# Altium PCB Universal_Driver v2.PcbDoc (part 1 of 2)
Units mm, origin at the board's own origin, x right, y up, seen from the top; angles counter-clockwise.
Board outline 105.6 x 112.5 mm, 2 copper layers (Top Layer, Bottom Layer); 170 components, 193 nets, 695 pads, 184 vias.
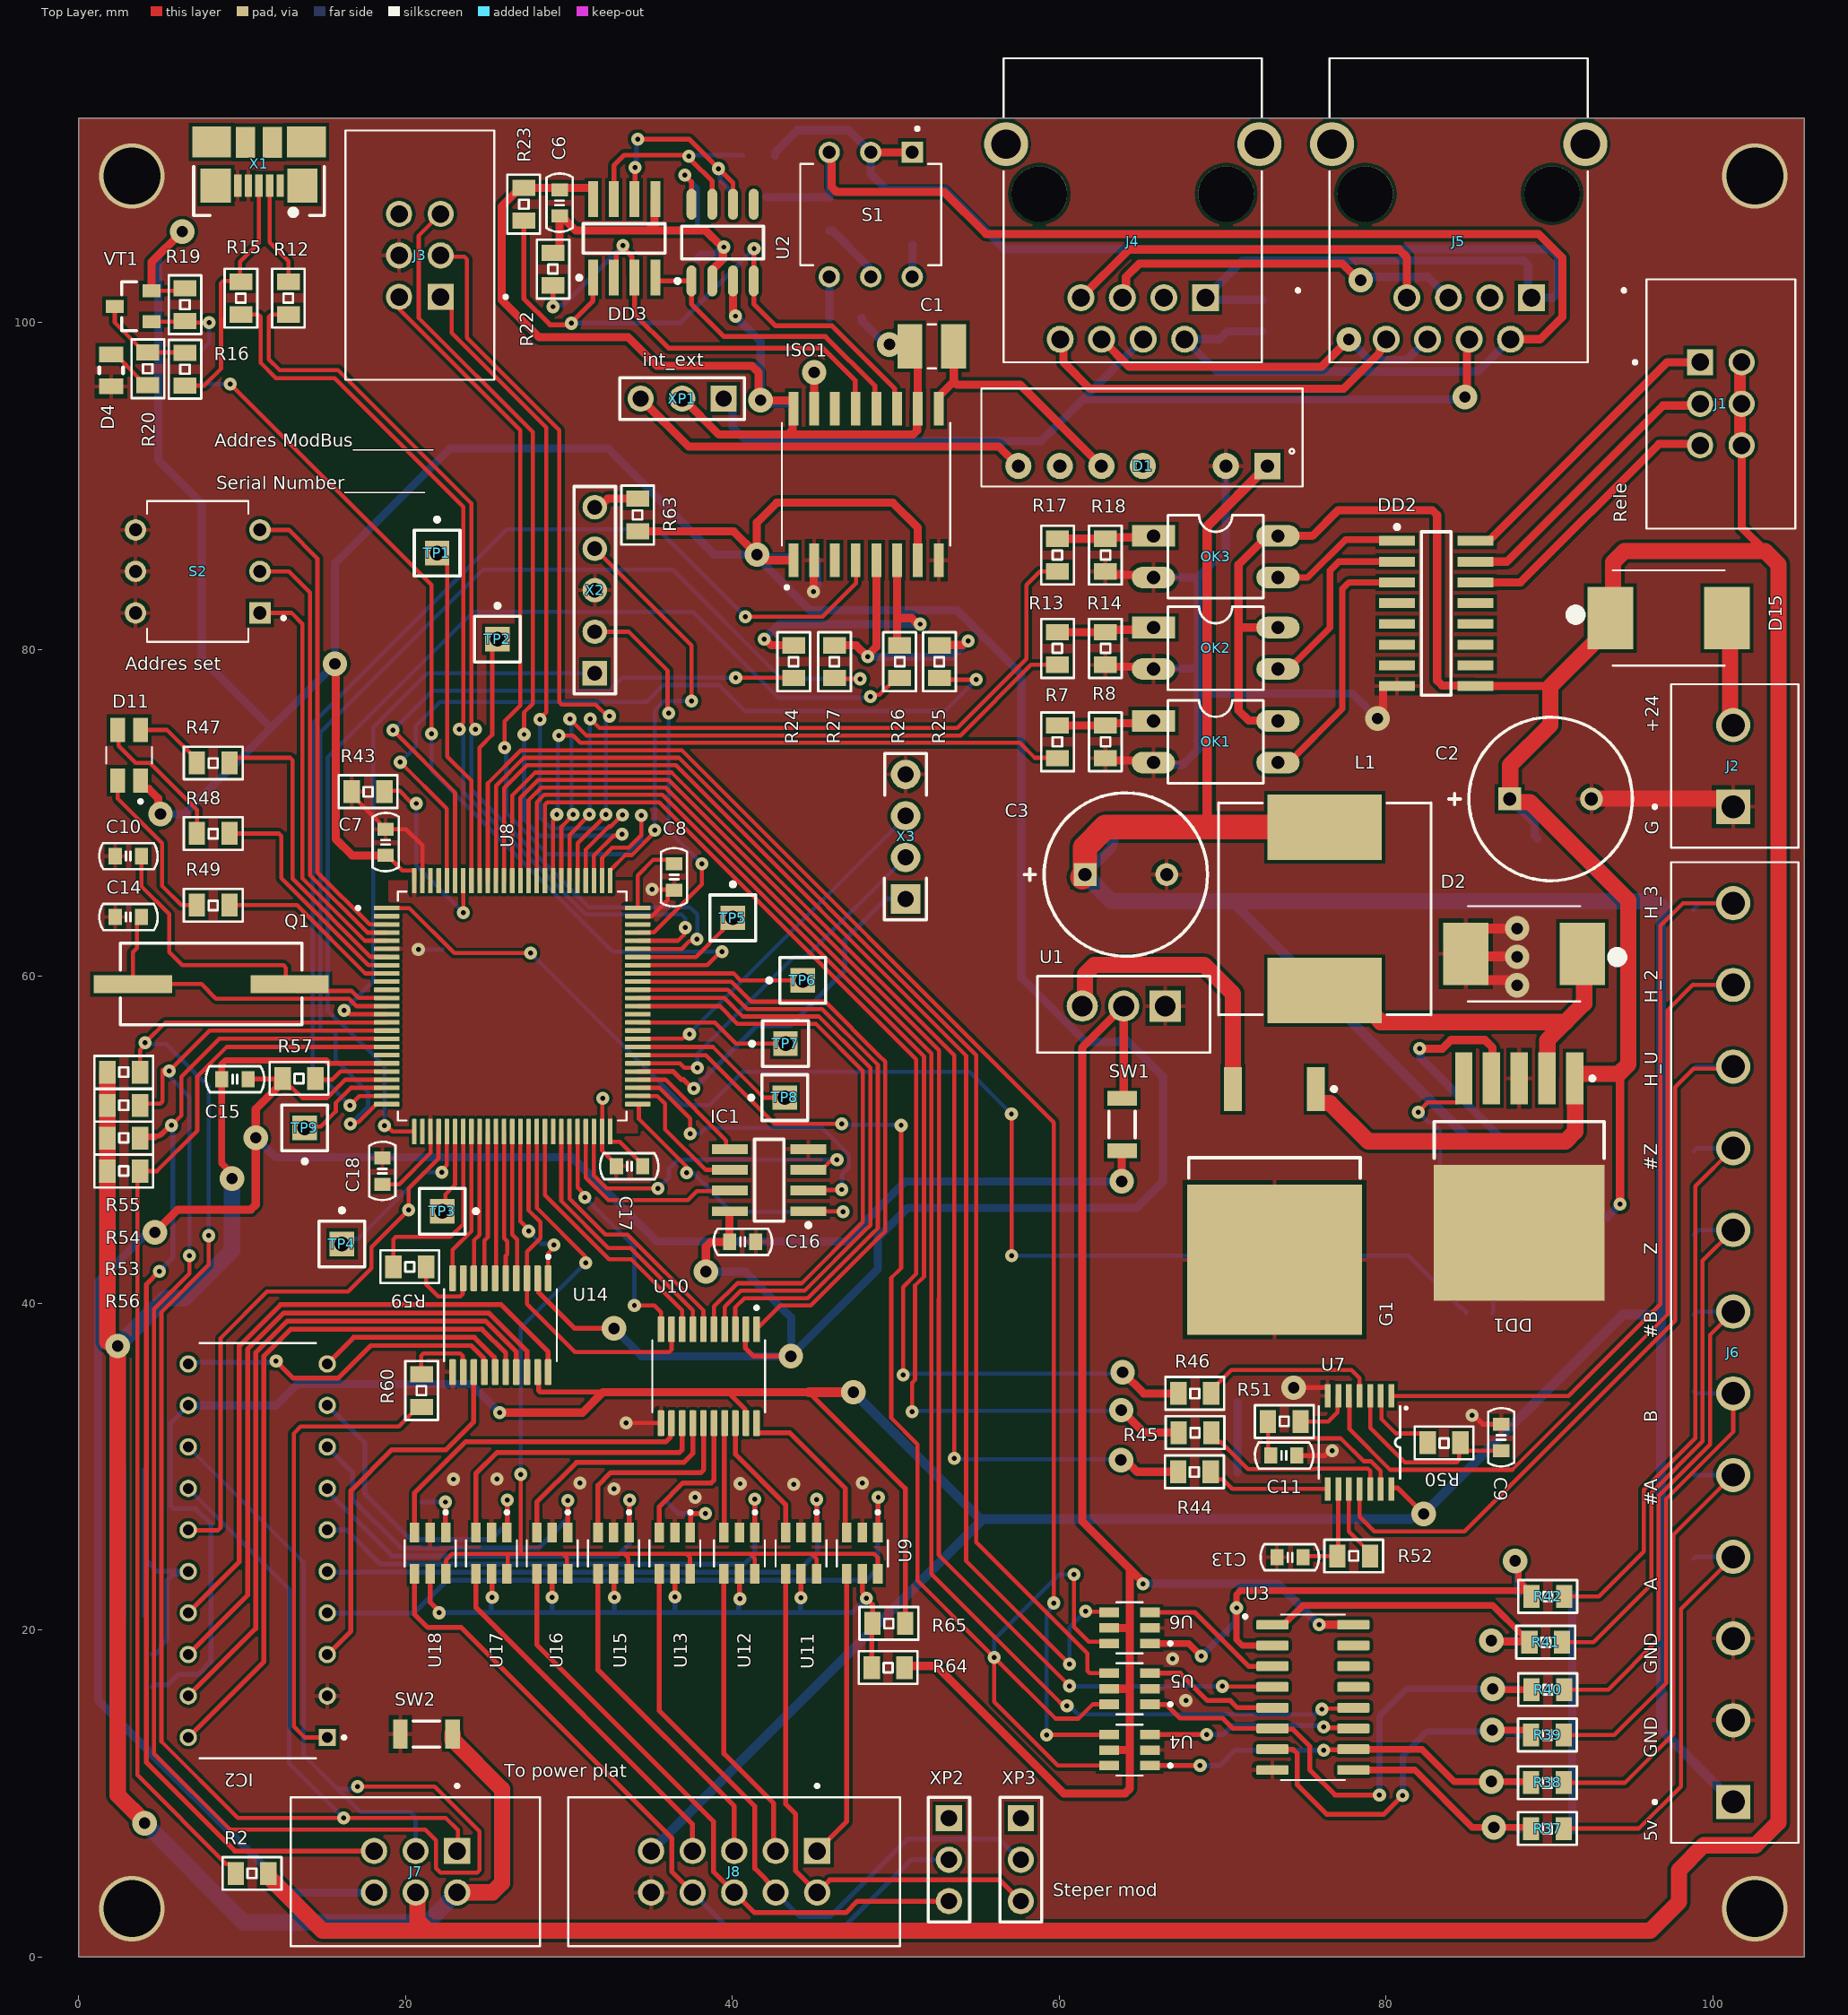
[diagram p0: Top Layer view]
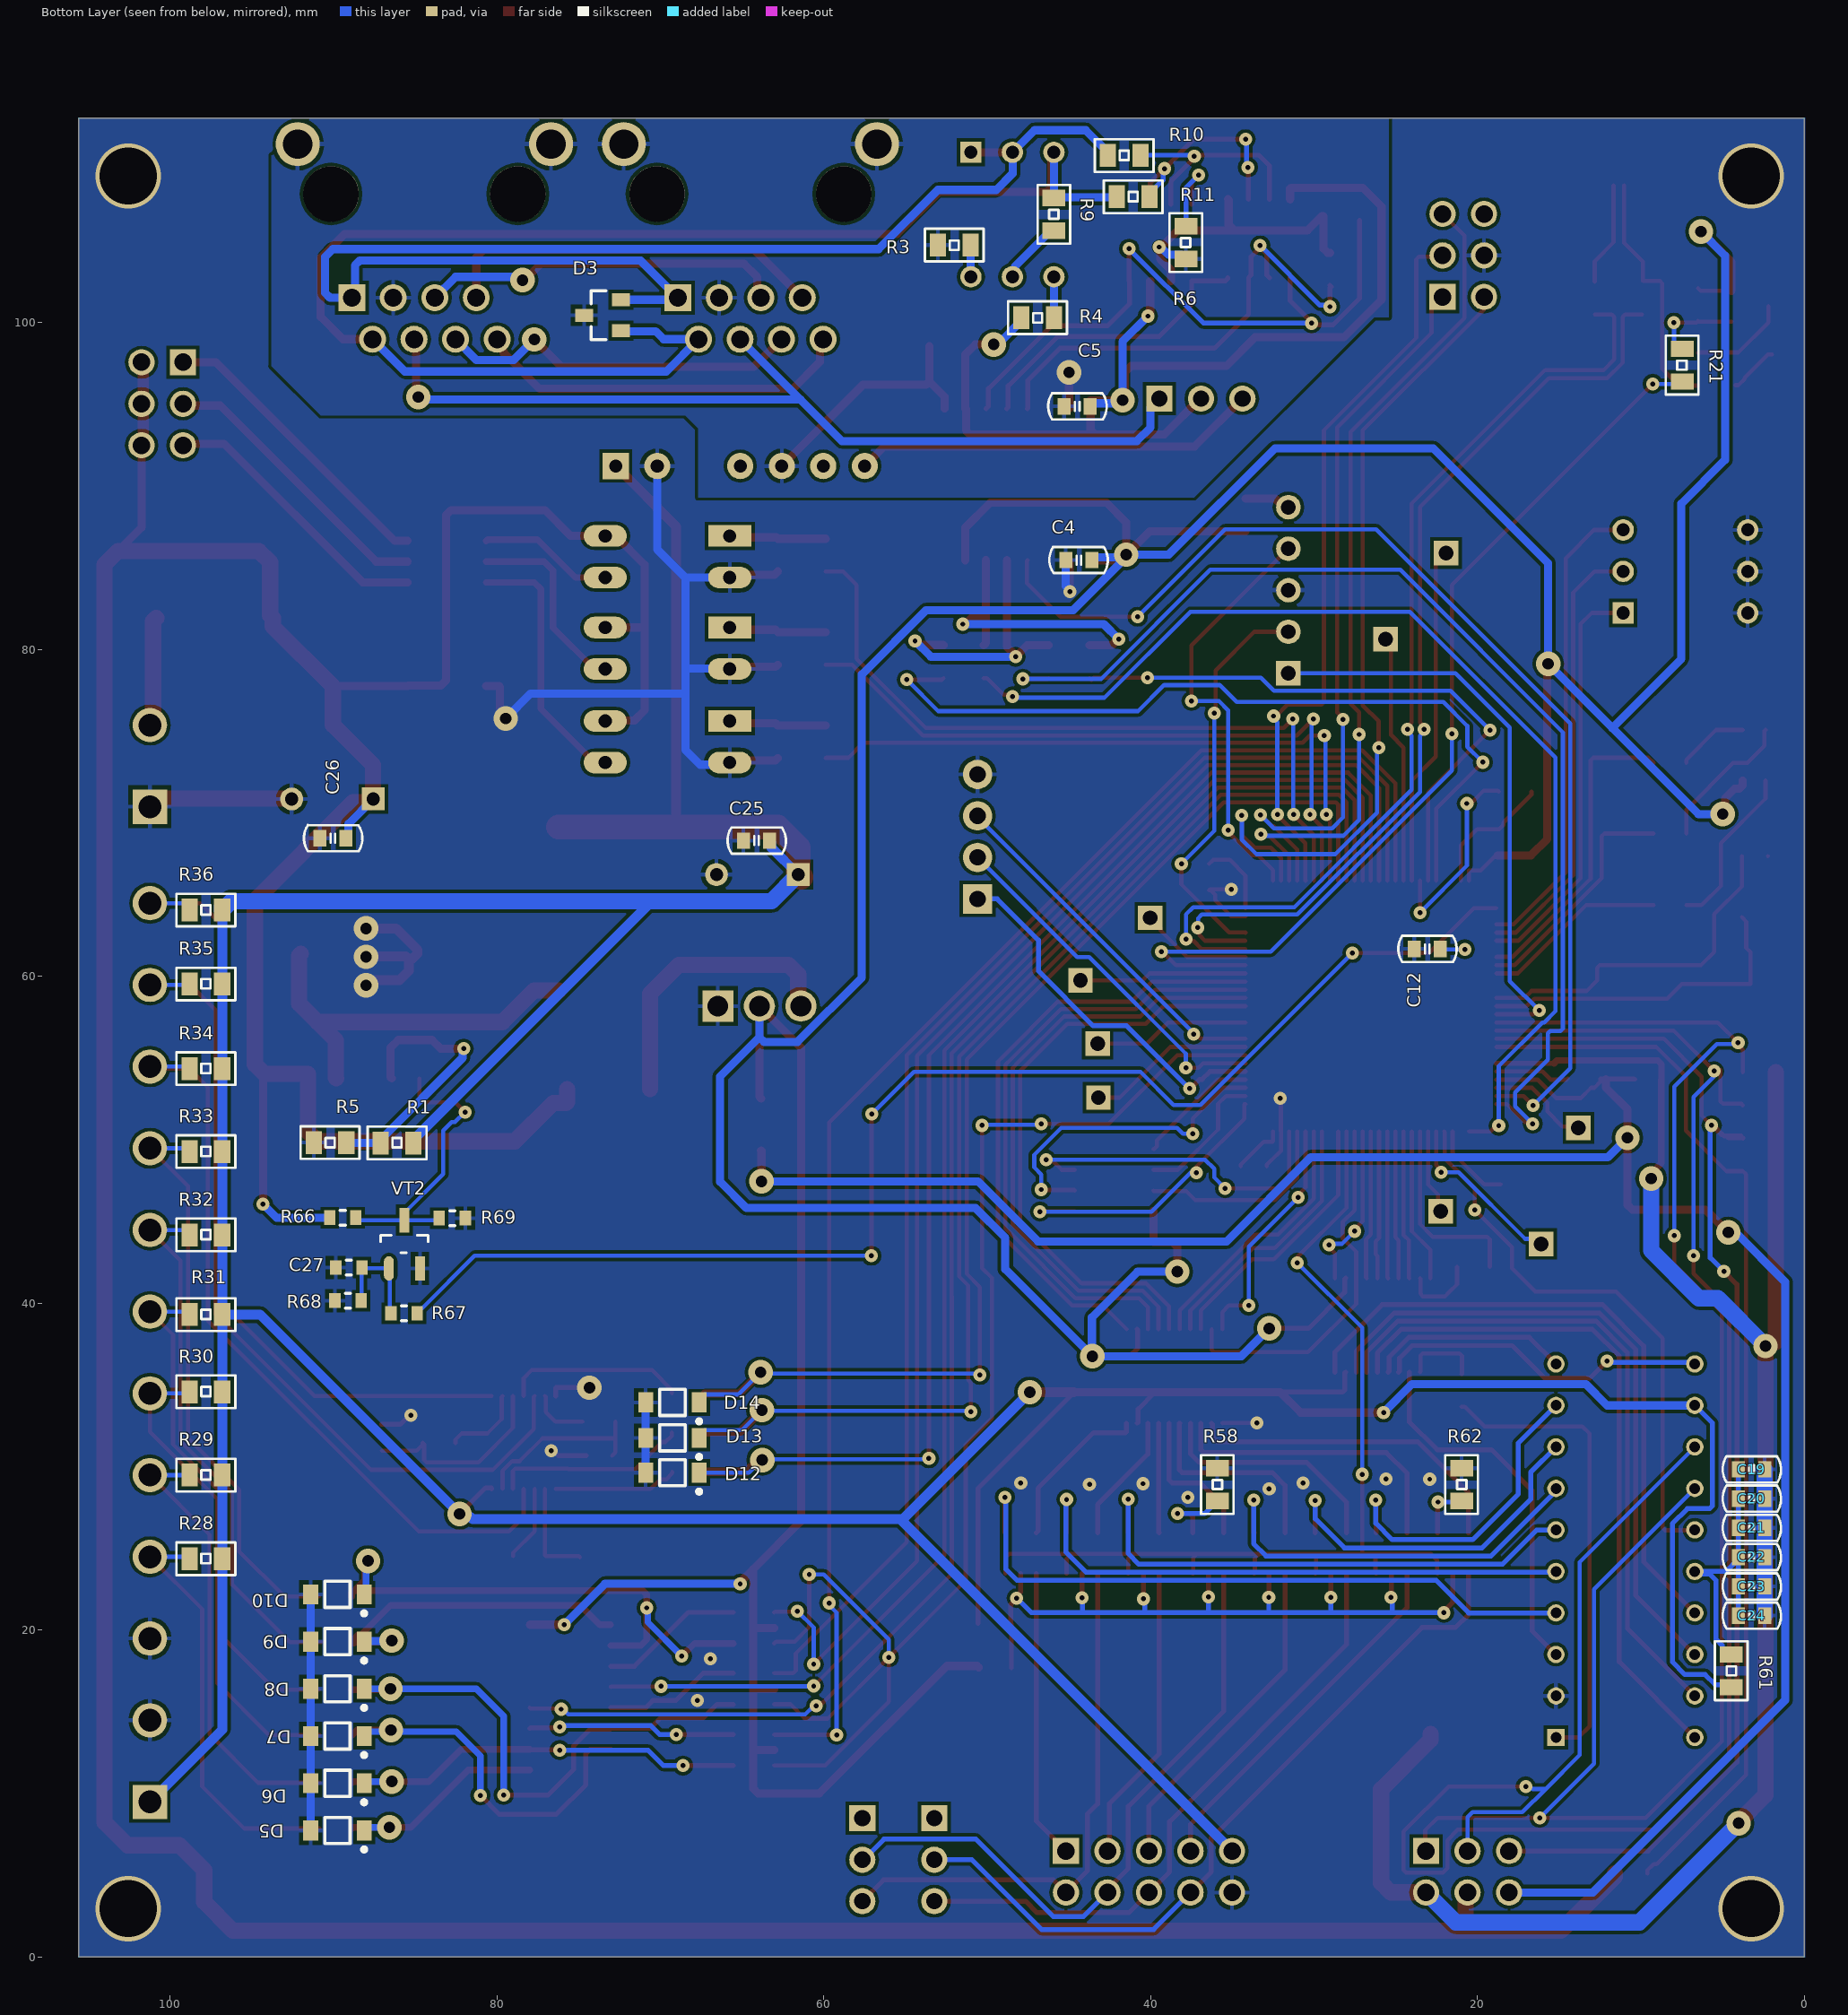
[diagram p1: Bottom Layer view, seen from below]

## Layer stack, top to bottom
Top Solder: solder mask 0.0102, Solder Resist, Dk 3.5
Top Layer: signal copper 0.0356
Dielectric 1: dielectric 0.32, FR-4, Dk 4.8
Bottom Layer: signal copper 0.0356
Bottom Solder: solder mask 0.0102, Solder Resist, Dk 3.5

## Board outline
0,0 0,112.5 105.6,112.5 105.6,0

## Design rules (kind name [scope] priority, off if disabled: settings)
Clearance [All] p1: gap=0.2 ignorepadtopadclearanceinfootprint=FALSE
DiffPairsRouting [All] p1: maxlimit=0.254 minlimit=0.2 mostfreqgap=0.254 toplayer_minwidth=0.25 toplayer_maxwidth=0.381 toplayer_prefwidth=0.381 bottomlayer_minwidth=0.25 bottomlayer_maxwidth=0.381 bottomlayer_prefwidth=0.381 maxuncoupledlength=12.7
HoleSize [All] p1: absolutevalues=TRUE maxlimit=5 minlimit=0.025 maxpercent=80.000 minpercent=20.000
MinimumSolderMaskSliver [All] p1: minsoldermaskwidth=0
PolygonConnect [All] p1: connectstyle=Relief reliefconductorwidth=0.254 reliefentries=4 polygonreliefangle="90 Angle" airgapwidth=0.254
RoutingVias [All] p1: holewidth=0.3 width=1 viastyle="Through Hole" minholewidth=0.3 minwidth=0 maxholewidth=1 maxwidth=4
SilkToSolderMaskClearance [IsPad] p1: minsilkscreentomaskgap=0.1 clearancetoexposedcopper=TRUE
SolderMaskExpansion [All] p1: expansion=0.102 istentingtop=FALSE
UnRoutedNet [All] p1: checkbadconnections=TRUE
Width [All] p1: maxlimit=4 minlimit=0.254 preferedwidth=0.254
25 further rules are at their usual default settings.

## Classes and differential pairs
differential pair USB_D: +USB_D_P -USB_D_N

## Components (designator, comment, footprint, x,y, rotation, side; value= is the part's Value field where it differs from the comment)
C1 "10uF" CAPC3225X270N 52.2,98.55 r180 top
C2 "220uF 50v" "ECR 10x13mm" 90.075,70.85 r0 top value=220uF
C3 "220uF 50v" "ECR 10x13mm" 64.075,66.225 r0 top value=220uF
C4 "0.1uF" "CAPACITOR 0603" 43.6,85.475 r0 bottom
C5 "0.1uF" "CAPACITOR 0603" 45.3,94.875 r180 bottom
C6 "0.1uF" "CAPACITOR 0603" 29.425,106.525 r90 top
C7 "0.1uF" "CAPACITOR 0603" 18.775,67.4 r90 top
C8 "0.1uF" "CAPACITOR 0603" 36.425,66.875 r270 top
C9 "0.1uF" "CAPACITOR 0603" 87.05,30.975 r90 top
C10 "20pF" "CAPACITOR 0603" 2.225,67.35 r0 top
C11 "0.1uF" "CAPACITOR 0603" 72.95,30.675 r0 top
C12 "0.1uF" "CAPACITOR 0603" 23.875,61.675 r180 bottom
C13 "0.1uF" "CAPACITOR 0603" 74.925,24.45 r180 top
C14 "20pF" "CAPACITOR 0603" 2.225,63.625 r0 top
C15 "0.001uF" "CAPACITOR 0603" 8.75,53.7 r0 top
C16 "0.1uF" "CAPACITOR 0603" 39.825,43.75 r0 top
C17 "0.1uF" "CAPACITOR 0603" 34.5,48.375 r180 top
C18 "0.1uF" "CAPACITOR 0603" 18.575,47.275 r90 top
C19 "0.1uF" "CAPACITOR 0603" 4.025,29.825 r180 bottom
C20 "0.1uF" "CAPACITOR 0603" 4.025,28.035 r180 bottom
C21 "0.1uF" "CAPACITOR 0603" 4.025,26.245 r180 bottom
C22 "0.01uF" "CAPACITOR 0603" 4.025,24.455 r180 bottom
C23 "0.01uF" "CAPACITOR 0603" 4.025,22.665 r180 bottom
C24 "0.01uF" "CAPACITOR 0603" 4.025,20.875 r180 bottom
C25 "0.1uF" "CAPACITOR 0603" 64.925,68.3 r180 bottom
C26 "0.1uF" "CAPACITOR 0603" 90.85,68.45 r180 bottom
C27 "0603 0.1uF" CAPCHIP0603 89.075,42.175 r180 bottom
D1 "AM1DS-0505SJZ" AM2D-NZ 72.74,91.225 r180 top
D2 "MBRS540T3G" DIOM7958X213N 88.45,61.375 r180 top
D3 "SM712" SOT23#1 73.55,100.45 r0 bottom
D4 "LED-0806" RESC0805X60N 1.975,97.075 r90 top
D5 "MMSZ5226BT1G" ONSC-SOD-123-2-425-04_V 89.775,7.725 r0 bottom
D6 "MMSZ5226BT1G" ONSC-SOD-123-2-425-04_V 89.775,10.615 r0 bottom
D7 "MMSZ5226BT1G" ONSC-SOD-123-2-425-04_V 89.775,13.505 r0 bottom
D8 "MMSZ5226BT1G" ONSC-SOD-123-2-425-04_V 89.775,16.395 r0 bottom
D9 "MMSZ5226BT1G" ONSC-SOD-123-2-425-04_V 89.775,19.285 r0 bottom
D10 "MMSZ5226BT1G" ONSC-SOD-123-2-425-04_V 89.775,22.175 r0 bottom
D11 "150141M173100" LED_150141M173100 3.075,73.525 r270 top
D12 "MMSZ5226BT1G" ONSC-SOD-123-2-425-04_V 69.275,29.625 r0 bottom
D13 "MMSZ5226BT1G" ONSC-SOD-123-2-425-04_V 69.275,31.75 r0 bottom
D14 "MMSZ5226BT1G" ONSC-SOD-123-2-425-04_V 69.275,33.925 r0 bottom
D15 "MBRS540T3G" DIOM7958X213N 97.3,81.925 r0 top
DD1 "LM2596S-ADJ" TO-263 88.15,47.75 r270 top
DD2 "ULN2003" NSO16 83.075,82.2 r0 top
DD3 "MAX485" NSO8 33.375,105.15 r90 top
G1 "L7812C - V" D2PAK_M 73.175,46.25 r270 top
IC1 "GD25Q16CTIGR" NSO8 42.25,47.525 r180 top
IC2 "L297" DIP850W45P254L2540H393Q20 10.95,24.85 r180 top
ISO1 "D?" *SOIC127P1030X265-16N 48.175,90.1 r90 top
J1 "DS1013-06SSIB1" CONNFLY_DS1013-06SSIB1 100.525,95.035 r270 top
J2 "TB003-500-P02BE" CUI_TB003-500-P02BE 101.25,70.375 r90 top
J3 "DS1013-06SSIB1" CONNFLY_DS1013-06SSIB1 20.84,104.115 r90 top
J4 "A-2004-2-4-LPS-N-R" ASSMANN_A-2004-2-4-LPS-N-R 64.5,107.875 r180 top
J5 "A-2004-2-4-LPS-N-R" ASSMANN_A-2004-2-4-LPS-N-R 84.45,107.875 r180 top
J6 "TB003-500-P12BE" CUI_TB003-500-P12BE 101.25,9.475 r90 top
J7 "DS1013-06SSIB1" CONNFLY_DS1013-06SSIB1 20.61,5.175 r180 top
J8 "DS1013-10SSIB1" CONNFLY_DS1013-10SSIB1 40.105,5.205 r180 top
L1 "SRR1208-6R5ML" SRR1208 76.25,64.125 r90 top
OK1 "PC814" DIL04 69.575,74.35 r270 top
OK2 "PC814" DIL04 69.575,80.075 r270 top
OK3 "PC814" DIL04 69.575,85.675 r270 top
Q1 "12MHz" HC49SM 8.1,59.525 r0 top
R1 "3K" "Resistor 0805" 87.125,49.8 r180 bottom
R2 "10K" "Resistor 0805" 9.6,5.1 r0 top
R3 "560" "Resistor 0805" 51.025,104.75 r0 bottom
R4 "560" "Resistor 0805" 45.925,100.3 r0 bottom
R5 "1K" "Resistor 0805" 89.225,49.825 r0 bottom
R6 "10K" "Resistor 0805" 37.85,103.9 r90 bottom
R7 "330" "Resistor 0805" 59.9,73.35 r90 top
R8 "1K" "Resistor 0805" 62.825,75.35 r270 top
R9 "120" "Resistor 0805" 45.925,105.625 r90 bottom
R10 "10" "Resistor 0805" 42.625,110.225 r180 bottom
R11 "10" "Resistor 0805" 42.075,107.7 r180 bottom
R12 "20" "Resistor 0805" 12.825,100.5 r90 top
R13 "330" "Resistor 0805" 59.9,79.063 r90 top
R14 "1K" "Resistor 0805" 62.825,81.062 r270 top
R15 "20" "Resistor 0805" 9.925,100.5 r90 top
R16 "1.5k" "Resistor 0805" 6.5,96.15 r90 top
R17 "330" "Resistor 0805" 59.9,84.775 r90 top
R18 "1K" "Resistor 0805" 62.825,86.775 r270 top
R19 "10k" "Resistor 0805" 6.5,100.1 r90 top
R20 "510" "Resistor 0805" 4.225,96.175 r90 top
R21 "1k" "Resistor 0805" 7.475,96.4 r90 bottom
R22 "10K" "Resistor 0805" 29.025,102.275 r90 top
R23 "10K" "Resistor 0805" 27.225,108.25 r270 top
R24 "0" "Resistor 0805" 43.75,78.25 r90 top
R25 "0" "Resistor 0805" 52.675,78.25 r90 top
R26 "0" "Resistor 0805" 50.225,80.25 r270 top
R27 "0" "Resistor 0805" 46.25,78.25 r90 top
R28 "10K" "Resistor 0805" 98.825,24.35 r180 bottom
R29 "10K" "Resistor 0805" 98.825,29.475 r180 bottom
R30 "10K" "Resistor 0805" 98.825,34.575 r180 bottom
R31 "10K" "Resistor 0805" 98.825,39.3 r180 bottom
R32 "10K" "Resistor 0805" 98.825,44.175 r180 bottom
R33 "10K" "Resistor 0805" 98.825,49.275 r180 bottom
R34 "10K" "Resistor 0805" 98.825,54.35 r180 bottom
R35 "10K" "Resistor 0805" 98.825,59.525 r180 bottom
R36 "10K" "Resistor 0805" 98.825,64.05 r180 bottom
R37 "20" "Resistor 0805" 90.875,7.85 r180 top
R38 "20" "Resistor 0805" 90.875,10.65 r180 top
R39 "20" "Resistor 0805" 90.875,13.575 r180 top
R40 "20" "Resistor 0805" 90.9,16.35 r180 top
R41 "20" "Resistor 0805" 90.775,19.25 r180 top
R42 "20" "Resistor 0805" 90.9,22.05 r180 top
R43 "510" "Resistor 0805" 18.7,71.3 r180 top
R44 "20" "Resistor 0805" 69.275,29.675 r180 top
R45 "20" "Resistor 0805" 69.312,32.078 r180 top
R46 "20" "Resistor 0805" 69.3,34.475 r180 top
R47 "3.9k" "Resistor 0805" 9.225,73.05 r180 top
R48 "3.9k" "Resistor 0805" 9.225,68.738 r180 top
R49 "3.9k" "Resistor 0805" 9.225,64.35 r180 top
R50 "3.3K" "Resistor 0805" 84.55,31.45 r180 top
R51 "3.3K" "Resistor 0805" 72.775,32.75 r0 top
R52 "3.3K" "Resistor 0805" 77.025,24.525 r0 top
R53 "1k" "Resistor 0805" 3.75,50.1 r180 top
R54 "1k" "Resistor 0805" 3.75,52.1 r180 top
R55 "1k" "Resistor 0805" 3.75,54.125 r180 top
R56 "1k" "Resistor 0805" 3.75,48.075 r180 top
R57 "0" "Resistor 0805" 14.475,53.75 r180 top
R58 "20k" "Resistor 0805" 35.925,29.9 r270 bottom
R59 "0" "Resistor 0805" 21.25,42.225 r180 top
R60 "0" "Resistor 0805" 20.975,33.65 r90 top
R61 "22K" "Resistor 0805" 4.475,18.5 r270 bottom
R62 "20k" "Resistor 0805" 20.975,29.9 r270 bottom
R63 "0" "Resistor 0805" 34.2,87.225 r90 top
R64 "0" "Resistor 0805" 50.525,17.7 r180 top
R65 "0" "Resistor 0805" 50.575,20.4 r180 top
R66 "0603 47k" RESCHIP0603 89.45,45.225 r0 bottom
R67 "0603 1k" RESCHIP0603 85.7,39.375 r0 bottom
R68 "0603 10k" RESCHIP0603 89.125,40.15 r0 bottom
R69 "opt" RESCHIP0603 82.75,45.2 r180 bottom
S1 "DS04-254-1L-03BK" SW_DS04-254-1L-03BK 48.465,106.615 r270 top
S2 "DS04-254-1L-03BK" SW_DS04-254-1L-03BK 7.275,84.775 r180 top
SW1 "" "R - 1206" 63.85,50.925 r270 top
SW2 "" "R - 1206" 21.275,13.625 r0 top
TP1 "" PIN1 21.925,85.9 r0 top
TP2 "" PIN1 25.625,80.625 r0 top
TP3 "" PIN1 22.25,45.625 r270 top
TP4 "" PIN1 16.1,43.625 r0 top
TP5 "" PIN1 40.025,63.575 r0 top
TP6 "" PIN1 44.3,59.75 r90 top
TP7 "" PIN1 43.25,55.875 r90 top
TP8 "" PIN1 43.2,52.575 r90 top
TP9 "" PIN1 13.825,50.725 r180 top
U1 "LM1117T-3.3" TO254P470X1016X2222-3P 61.41,57.159 r180 top
U2 "MCP2551-I/SN" SOIC-SN8_L 39.4,104.9 r90 top
U3 "AM26LV32IDR" SOIC127P600X175-16N 75.525,15.875 r0 top
U4 "TS5A3160DBVR" *SOT95P280X145-6N 64.3,12.65 r180 top
U5 "TS5A3160DBVR" *SOT95P280X145-6N 64.3,16.4 r180 top
U6 "TS5A3160DBVR" *SOT95P280X145-6N 64.3,20.125 r180 top
U7 "74VHC14MTC" SOP65P640X120-14N 78.375,31.475 r270 top
U8 "STM32F303V" QFP50P1600X1600X160-100N 26.525,58.175 r0 top
U9 "TS5A3160DBVR" *SOT95P280X145-6N 47.95,24.695 r270 top
U10 "TXS0108EPWR" SOP65P640X120-20N 38.55,35.525 r270 top
U11 "TS5A3160DBVR" *SOT95P280X145-6N 44.2,24.695 r270 top
U12 "TS5A3160DBVR" *SOT95P280X145-6N 40.425,24.695 r270 top
U13 "TS5A3160DBVR" *SOT95P280X145-6N 36.475,24.695 r270 top
U14 "TXS0108EPWR" SOP65P640X120-20N 25.8,38.65 r270 top
U15 "TS5A3160DBVR" *SOT95P280X145-6N 32.725,24.695 r270 top
U16 "TS5A3160DBVR" *SOT95P280X145-6N 28.975,24.695 r270 top
U17 "TS5A3160DBVR" *SOT95P280X145-6N 25.25,24.695 r270 top
U18 "TS5A3160DBVR" *SOT95P280X145-6N 21.5,24.695 r270 top
VT1 "PNP BEC" SOT23#1 3.325,101 r180 top
VT2 "BC846" SOT23#2 85.675,43.6 r180 bottom
X1 "47346-0001(molex)" "X - Micro USB B (Bottom mount ass'y)" 11.025,111.05 r270 top
X2 "PLS-5" PLS-5-3D 31.575,78.545 r90 top
X3 "PLS-4" "X - PLS - 4" 50.6,68.545 r90 top
XP1 "PLS-3" ZL201-3#1 36.925,95.35 r180 top
XP2 "PLS-3" ZL201-3#2 53.25,5.94 r270 top
XP3 "PLS-3" ZL201-3#1 57.65,5.94 r270 top

## Footprints (in the part's own frame and the unit in brackets; to place one, negate y for a bottom-side part, rotate by r counter-clockwise, add the part's x,y. Pads: shape width x height; smd on the part's side, far side on the other; paste and mask are expansions set on the pad)
*SOIC127P1030X265-16N [mm]
  rect 2.06x0.6 smd: 1(-4.64,4.445) 2(-4.64,3.175) 3(-4.64,1.905) 4(-4.64,0.635) 5(-4.64,-0.635) 6(-4.64,-1.905) 7(-4.64,-3.175) 8(-4.64,-4.445) 9(4.64,-4.445) 10(4.64,-3.175) 11(4.64,-1.905) 12(4.64,-0.635) 13(4.64,0.635) 14(4.64,1.905) 15(4.64,3.175) 16(4.64,4.445)
  silkscreen extent -6.4,-5.15 3.75,5.15
*SOT95P280X145-6N [mm]
  rect 1.21x0.58 smd: 1(-1.255,0.95) 2(-1.255,0) 3(-1.255,-0.95) 4(1.255,-0.95) 5(1.255,0) 6(1.255,0.95)
  silkscreen extent -2.6,-1.56 0.8,1.56
AM2D-NZ [mm]
  rect 1.6x1.6 hole 0.8: 1(0,0)
  round 1.6 hole 0.8: 2(2.54,0) 4(7.62,0) 5(10.16,0) 6(12.7,0) 7(15.24,0)
  silkscreen extent -2.15,-4.75 17.5,1.25
ASSMANN_A-2004-2-4-LPS-N-R [mm]
  rect 1.65x1.65 hole 1.1: 1(-4.445,6.35)
  round 1.65 hole 1.1: 2(-3.175,8.89) 3(-1.905,6.35) 4(-0.635,8.89) 5(0.635,6.35) 6(1.905,8.89) 7(3.175,6.35) 8(4.445,8.89)
  round 2.7 hole 1.8: S1(-7.75,-3.05) S2(7.75,-3.05)
  round 3.4 hole 3.4 unplated: ""(-5.715,0) ""(5.715,0)
  silkscreen extent -10.21,-8.3 7.9,10.3
"CAPACITOR 0603" [mm]
  rect 0.8x1 smd: 1(0,0) 2(1.6,0)
  silkscreen extent -0.97,-0.8 2.6,0.8, body extent -0.01,-0.38 1.64,0.42, height 0.81
CAPC3225X270N [mm]
  rect 1.53x2.72 smd: 1(-1.341,0) 2(1.341,0)
  silkscreen extent -0.26,-1.35 0.26,1.35
CAPCHIP0603 [mm] "Chip Capacitor, 2-Leads, Body 1,6x0,8mm"
  rect 0.7x0.9 smd mask+0.06: 1(-0.8,0) 2(0.8,0)
  silkscreen extent -0.15,-0.45 0.15,0.45, body extent -0.8,-0.4 0.8,0.4, height 0.9
CONNFLY_DS1013-06SSIB1 [mm]
  rect 1.605x1.605 hole 1.07: 1(-2.54,-1.3)
  round 1.605 hole 1.07: 2(-2.54,1.24) 3(0,-1.3) 4(0,1.24) 5(2.54,-1.3) 6(2.54,1.24)
  silkscreen extent -7.61,-5.38 7.64,4.52
CONNFLY_DS1013-10SSIB1 [mm]
  rect 1.605x1.605 hole 1.07: 1(-5.08,-1.27)
  round 1.605 hole 1.07: 2(-5.08,1.27) 3(-2.54,-1.27) 4(-2.54,1.27) 5(0,-1.27) 6(0,1.27) 7(2.54,-1.27) 8(2.54,1.27) 9(5.08,-1.27) 10(5.08,1.27)
  silkscreen extent -10.15,-5.35 10.15,4.55
CUI_TB003-500-P02BE [mm]
  rect 2.1x2.1 hole 1.4: 1(0,0)
  round 2.1 hole 1.4: 2(5,0)
  silkscreen extent -2.5,-4 7.5,4.9
CUI_TB003-500-P12BE [mm]
  rect 2.1x2.1 hole 1.4: 1(0,0)
  round 2.1 hole 1.4: 2(5,0) 3(10,0) 4(15,0) 5(20,0) 6(25,0) 7(30,0) 8(35,0) 9(40,0) 10(45,0) 11(50,0) 12(55,0)
  silkscreen extent -2.5,-4 57.5,4.9
D2PAK_M [mm] "D2-PAK, 4-Leads, Body 8.8x10.4mm, Pitch 2.54mm, Lead Span 15.1mm, IPC Low Density"
  rect 2.7x1.1 smd: 1(-6.85,2.54) 3(-6.85,-2.54)
  rect 9.2x10.7 smd: 2(3.6,0)
  silkscreen extent -6.97,-5.25 -1.4,5.25, body extent -2.65,-5.28 6.35,5.28, height 4.69
DIL04 [mil]
  rect 52x104 hole 32: 1(-50,-150)
  oval 52x104 hole 32: 2(50,-150) 3(50,150) 4(-50,150)
  silkscreen extent -100,-115 100,115
DIOM7958X213N [mil]
  rect 110x150 smd: A(140.49,0) C(-140.49,0)
  silkscreen extent -237,-115 135,115
DIP850W45P254L2540H393Q20 [mm]
  rect 1.06x1.06 hole 0.66: 1(-4.25,11.43)
  round 1.06 hole 0.66: 2(-4.25,8.89) 3(-4.25,6.35) 4(-4.25,3.81) 5(-4.25,1.27) 6(-4.25,-1.27) 7(-4.25,-3.81) 8(-4.25,-6.35) 9(-4.25,-8.89) 10(-4.25,-11.43) 11(4.25,-11.43) 12(4.25,-8.89) 13(4.25,-6.35) 14(4.25,-3.81) 15(4.25,-1.27) 16(4.25,1.27) 17(4.25,3.81) 18(4.25,6.35) 19(4.25,8.89) 20(4.25,11.43)
  silkscreen extent -5.38,-12.7 3.55,12.7
"ECR 10x13mm" [mm] "Rad Capacitor 50В-220мкФ"
  rect 1.4x1.4 hole 0.8 mask+0.06: 1(-2.5,0)
  round 1.4 hole 0.8 mask+0.06: 2(2.5,0)
  silkscreen extent -6.22,-5 5,5, body extent -5,-5 4.97,5, height 12.51
HC49SM [mm] "Quartz crystal resonator"
  rect 4.8x1.1 smd mask+0.06: 1(-4.8,0) 2(4.8,0)
  silkscreen extent -5.55,-2.5 5.55,2.5, body extent -6.7,-2.45 6.7,2.45, height 5.09
LED_150141M173100 [mm]
  rect 1.5x0.9 smd: 1(1.55,0.7) 2(1.55,-0.7) 3(-1.55,0.7) 4(-1.55,-0.7)
  silkscreen extent -0.5,-1.4 2.92,1.4
NSO8 [mm] "SOIC, 8-Leads, Body 4.9x3.9mm, Pitch 1.27mm"
  rect 2.2x0.6 smd mask+0.06: 1(-2.4,1.905) 2(-2.4,0.635) 3(-2.4,-0.635) 4(-2.4,-1.905) 5(2.4,-1.905) 6(2.4,-0.635) 7(2.4,0.635) 8(2.4,1.905)
  silkscreen extent -2.52,-2.5 0.9,2.88, body extent -3,-2.45 3,2.45, height 1.7
NSO16 [mm] "SOIC, 16-Leads, Body 9.9x3.9mm, Pitch 1.27mm,"
  rect 2.2x0.6 smd mask+0.06: 1(-2.4,4.445) 2(-2.4,3.175) 3(-2.4,1.905) 4(-2.4,0.635) 5(-2.4,-0.635) 6(-2.4,-1.905) 7(-2.4,-3.175) 8(-2.4,-4.445) 9(2.4,-4.445) 10(2.4,-3.175) 11(2.4,-1.905) 12(2.4,-0.635) 13(2.4,0.635) 14(2.4,1.905) 15(2.4,3.175) 16(2.4,4.445)
  silkscreen extent -2.52,-5 0.9,5.42, body extent -3.04,-5 3.04,5, height 1.65
ONSC-SOD-123-2-425-04_V [mm] "SOD, 2-Leads, Body 2.69x1.6mm"
  rect 0.91x1.22 smd: 1(-1.635,0) 2(1.635,0)
  silkscreen extent -1.76,-0.8 0.78,1.28, body extent -1.35,-0.8 1.35,0.8, height 1.35
PIN1 [mm] "Generic Antenna; 1 Lead"
  rect 1.5x1.5 hole 0.9: 1(0,0)
  silkscreen extent -1.4,-1.4 1.4,2.17
PLS-5-3D [mm] "Connector; Header; 5 Position"
  rect 1.5x1.5 hole 0.9: 1(0,0)
  round 1.5 hole 0.9: 2(2.54,0) 3(5.08,0) 4(7.62,0) 5(10.16,0)
  silkscreen extent -1.27,-1.27 11.43,1.27, body extent -1.27,-1.27 11.43,1.27, height 8.44
QFP50P1600X1600X160-100N [mm]
  rrect25% 1.56x0.28 smd: 1(-7.68,6) 2(-7.68,5.5) 3(-7.68,5) 4(-7.68,4.5) 5(-7.68,4) 6(-7.68,3.5) 7(-7.68,3) 8(-7.68,2.5) 9(-7.68,2) 10(-7.68,1.5) 11(-7.68,1) 12(-7.68,0.5) 13(-7.68,0) 14(-7.68,-0.5) 15(-7.68,-1) 16(-7.68,-1.5) 17(-7.68,-2) 18(-7.68,-2.5) 19(-7.68,-3) 20(-7.68,-3.5) 21(-7.68,-4) 22(-7.68,-4.5) 23(-7.68,-5) 24(-7.68,-5.5) 25(-7.68,-6) 51(7.68,-6) 52(7.68,-5.5) 53(7.68,-5) 54(7.68,-4.5) 55(7.68,-4) 56(7.68,-3.5) 57(7.68,-3) 58(7.68,-2.5) 59(7.68,-2) 60(7.68,-1.5) 61(7.68,-1) 62(7.68,-0.5) 63(7.68,0) 64(7.68,0.5) 65(7.68,1) 66(7.68,1.5) 67(7.68,2) 68(7.68,2.5) 69(7.68,3) 70(7.68,3.5) 71(7.68,4) 72(7.68,4.5) 73(7.68,5) 74(7.68,5.5) 75(7.68,6)
  rrect25% 0.28x1.56 smd: 26(-6,-7.68) 27(-5.5,-7.68) 28(-5,-7.68) 29(-4.5,-7.68) 30(-4,-7.68) 31(-3.5,-7.68) 32(-3,-7.68) 33(-2.5,-7.68) 34(-2,-7.68) 35(-1.5,-7.68) 36(-1,-7.68) 37(-0.5,-7.68) 38(0,-7.68) 39(0.5,-7.68) 40(1,-7.68) 41(1.5,-7.68) 42(2,-7.68) 43(2.5,-7.68) 44(3,-7.68) 45(3.5,-7.68) 46(4,-7.68) 47(4.5,-7.68) 48(5,-7.68) 49(5.5,-7.68) 50(6,-7.68) 76(6,7.68) 77(5.5,7.68) 78(5,7.68) 79(4.5,7.68) 80(4,7.68) 81(3.5,7.68) 82(3,7.68) 83(2.5,7.68) 84(2,7.68) 85(1.5,7.68) 86(1,7.68) 87(0.5,7.68) 88(0,7.68) 89(-0.5,7.68) 90(-1,7.68) 91(-1.5,7.68) 92(-2,7.68) 93(-2.5,7.68) 94(-3,7.68) 95(-3.5,7.68) 96(-4,7.68) 97(-4.5,7.68) 98(-5,7.68) 99(-5.5,7.68) 100(-6,7.68)
  silkscreen extent -9.54,-7 7,7
"R - 1206" [mm] "Резистор 1206"
  rect 0.9x1.8 smd: 1(-1.6,0) 2(1.6,0)
  silkscreen extent -0.8,-0.8 0.8,0.8, body extent -1.6,-0.8 1.6,0.8, height 0.6
RESC0805X60N [mm]
  rect 0.96x1.47 smd: 1(-0.978,0) 2(0.978,0)
  silkscreen extent -0.18,-0.72 0.18,0.72
RESCHIP0603 [mm] "Chip Resistor, 2-Leads, Body 1,6x0,8mm"
  rect 0.7x0.9 smd mask+0.06: 1(-0.8,0) 2(0.8,0)
  silkscreen extent -0.15,-0.45 0.15,0.45, body extent -0.8,-0.4 0.8,0.4, height 0.4
"Resistor 0805" [mm]
  rect 1x1.4 smd: 1(0,0) 2(2,0)
  silkscreen extent -0.8,-1 2.8,1, body extent -0.03,-0.65 2.02,0.65, height 0.41
SOIC127P600X175-16N [mm]
  rrect25% 1.97x0.6 smd: 1(-2.475,4.445) 2(-2.475,3.175) 3(-2.475,1.905) 4(-2.475,0.635) 5(-2.475,-0.635) 6(-2.475,-1.905) 7(-2.475,-3.175) 8(-2.475,-4.445) 9(2.475,-4.445) 10(2.475,-3.175) 11(2.475,-1.905) 12(2.475,-0.635) 13(2.475,0.635) 14(2.475,1.905) 15(2.475,3.175) 16(2.475,4.445)
  silkscreen extent -4.24,-5.06 1.95,5.06, body extent -3,-4.95 3,4.95, height 1.75
SOIC-SN8_L [mm] "SOIC, 8-Leads, Body 4.9x3.8mm, Pitch 1.27mm, IPC High Density"
  oval 1.9x0.6 smd: 1(-2.35,1.905) 2(-2.35,0.635) 3(-2.35,-0.635) 4(-2.35,-1.905) 5(2.35,-1.905) 6(2.35,-0.635) 7(2.35,0.635) 8(2.35,1.905)
  silkscreen extent -2.47,-2.5 1,2.88, body extent -2,-2.5 2,2.5, height 1.75
SOP65P640X120-14N [mil]
  rect 56x14 smd: 1(-112,77) 2(-112,51) 3(-112,26) 4(-112,0) 5(-112,-26) 6(-112,-51) 7(-112,-77) 8(112,-77) 9(112,-51) 10(112,-26) 11(112,0) 12(112,26) 13(112,51) 14(112,77)
  silkscreen extent -87,-98 87,115
SOP65P640X120-20N [mm]
  rrect25% 1.57x0.41 smd: 1(-2.87,2.925) 2(-2.87,2.275) 3(-2.87,1.625) 4(-2.87,0.975) 5(-2.87,0.325) 6(-2.87,-0.325) 7(-2.87,-0.975) 8(-2.87,-1.625) 9(-2.87,-2.275) 10(-2.87,-2.925) 11(2.87,-2.925) 12(2.87,-2.275) 13(2.87,-1.625) 14(2.87,-0.975) 15(2.87,-0.325) 16(2.87,0.325) 17(2.87,0.975) 18(2.87,1.625) 19(2.87,2.275) 20(2.87,2.925)
  silkscreen extent -4.29,-3.45 2.2,3.45, body extent -3.16,-3.25 3.24,3.25, height 1.2
SOT23#1 [mm] "SOT23, 3-Leads, Body 2.9x1.3mm, Pitch 0.95mm"
  rect 1.1x0.8 smd mask+0.06: 1(-1.125,0.95) 2(-1.125,-0.95) 3(1.125,0)
  silkscreen extent -0.2,-1.5 0.7,1.5, body extent -1.32,-1.5 1.32,1.5, height 1.08
SOT23#2 [mm] "Корпус"
  oval 0.6x1.5 smd: 1(-0.95,-1.475)
  rect 0.6x1.5 smd: 2(0.95,-1.475) 3(0,1.475)
  silkscreen extent -1.45,-0.53 1.45,0.55, body extent -1.5,-1.27 1.5,1.27, height 1.1
SRR1208 [mm]
  rect 4x7 smd: P$1(-5,0) P$2(5,0)
  silkscreen extent -6.5,-6.5 6.5,6.5
SW_DS04-254-1L-03BK [mm]
  rect 1.308x1.308 hole 0.8: 1A(-3.81,2.54)
  round 1.308 hole 0.8: 1B(3.81,2.54) 2A(-3.81,0) 2B(3.81,0) 3A(-3.81,-2.54) 3B(3.81,-2.54)
  silkscreen extent -5.35,-4.31 3.1,4.31
TO254P470X1016X2222-3P [mil]
  rect 75x75 hole 50: 1(-200,-40)
  round 75 hole 50: 2(-100,-40) 3(0,-40)
  silkscreen extent -308,-112 108,72
TO-263 [mm] "D2-PAK, 6-Leads, Body 8.6x10.2mm, Pitch 1.7mm, Lead Span 14.1mm"
  rect 3.2x1.05 smd mask+0.06: 1(-6,3.4) 2(-6,1.7) 3(-6,0) 4(-6,-1.7) 5(-6,-3.4)
  rect 8.3x10.45 smd mask+0.06: 6(3.45,0)
  silkscreen extent -6.12,-5.2 -1.1,5.2, body extent -7.18,-5.08 7.46,5.08, height 4.57
"X - Micro USB B (Bottom mount ass'y)" [mm] "Разъем микро USB B с нижним крепежом (molex)"
  rect 1.9x2.375 smd: 0(0,2.9) 0(0,-2.9)
  rect 1.9x1.175 smd: 0(0.01,0.825) 0(0.01,-0.825)
  rect 2.1x1.85 smd: 0(2.66,2.65) 0(2.66,-2.65)
  rect 1.38x0.45 smd: 1(2.66,1.3) 2(2.66,0.65) 3(2.66,0) 4(2.66,-0.65) 5(2.66,-1.3)
  silkscreen extent 1.5,-4 4.5,4, body extent -2.31,-3.98 3.12,4, height 2.72
"X - PLS - 4" [mm] "Разъем тестирования"
  rect 1.8x1.8 hole 1: 1(-3.81,0)
  round 1.8 hole 1: 2(-1.27,0) 3(1.27,0) 4(3.81,0)
  silkscreen extent -5.09,-1.28 5.08,1.3, body extent -5.08,-1.24 5.08,1.3, height 8.8
ZL201-3#1 [mm] "Connector; PLS-3; pitch 2.54"
  rect 1.6x1.6 hole 1 mask+0.06: 1(-2.54,0)
  round 1.6 hole 1 mask+0.06: 2(0,0) 3(2.54,0)
  silkscreen extent -3.81,-1.27 3.81,1.27, body extent -3.81,-1.27 3.81,1.27, height 8.44
ZL201-3#2 [mm] "Connector; PLS-3; pitch 2.54"
  rect 1.6x1.6 hole 1 mask+0.102: 1(-2.54,0)
  round 1.6 hole 1 mask+0.06: 2(0,0) 3(2.54,0)
  silkscreen extent -3.81,-1.27 3.81,1.27, body extent -3.81,-1.27 3.81,1.27, height 8.44

## Part data
C1 C4 C5 C6 C7 C8 C9 C10 C11 C12 C13 C14 C15 C16 C17 C18 C19 C20 C21 C22 C23 C24 C25 C26: library part Capasitor
C2 C3: library part "Cap Pol", "Polarized Capacitor (Rad)", Voltage=50, Type=Type, URL=http://www.hitano.com.tw/PDF/ECR_081225.pdf
C27: library part "Cap C", "Ceramic Capacitor", Nominal_voltage_V=50, Body=0603, Class="Электронные компоненты", Installation=SMD, Ordering_Information="0603, 0.1uF, 50V", Pins=2, SubClass=Конденсаторы, TKE={TKE}
D2 D15: "Diode Schottky 40V 5A Surface Mount SMC", Package="DO-214 ON Semiconductor", Availability=Unavailable, MF="ON Semiconductor", MP=MBRS540T3G, Price=None, SnapEDA_Link=https://www.snapeda.com/parts/MBRS540T3G/ON%20Semiconductor/view-part/78777/?ref=snap
D3: "Asymmetrical TVS Diode for Extended Common-Mode RS-485"
D5 D6 D7 D8 D9 D10 D12 D13 D14: "Zener Voltage Regulator, 500 mW, 2-Pin SOD-123, Pb-Free, Tape and Reel", Manufacturer="On Semiconductor", Supplier Part Number 1=MMSZ5226BT1GOSTR-ND, ComponentLink1Description="Manufacturer URL", ComponentLink1URL=http://www.onsemi.com/, ComponentLink2Description=Datasheet, ComponentLink2URL=http://www.onsemi.com/pub_link/Collateral/MMSZ5221BT1-D.PDF, ComponentLink3Description="Package Specification", ComponentLink3URL=http://www.onsemi.com/pub_link/Collateral/425-04.PDF, DatasheetVersion="Rev. 12", Mounting Technology="Surface Mount", P Max (W)=0.5, PackageDescription="2-Pin SOD, Body 1.6 x 2.69 mm", PackageReference=SOD-123-2-425-04, PackageVersion="Rev. G, 10/2009", Packing="Tape and Reel", PartNumber=MMSZ5226BT1G, RoHS=Pb-Free, Supplier 1=Digi-Key, Supplier 2=Digi-Key, Supplier 3=Digi-Key, Supplier 4=Farnell, Supplier 5=Farnell, Supplier 6=Farnell, Supplier 7=Newark, Supplier 8=Newark, Supplier 9=Mouser, Supplier Part Number 2=MMSZ5226BT1GOSCT-ND, Supplier Part Number 3=MMSZ5226BT1GOSDKR-ND, Supplier Part Number 4=1431269, Supplier Part Number 5=1431269RL, Supplier Part Number 6=2370825, Supplier Part Number 7=67R1367, Supplier Part Number 8=45J1591, Supplier Part Number 9=863-MMSZ5226BT1G, VZ Typ (V)=3.3
D11: "Red, Green, Blue _RGB_ 625nm Red, 520nm Green, 470nm Blue LED Indication - Discrete 2V Red, 3.2V Green, 3.2V Blue 1411 _3528 Metric_", Package="1411 WÃ¼rth Elektronik", Availability=Unavailable, MF="Wurth Electronics", MP=150141M173100, Price=None, SnapEDA_Link=https://www.snapeda.com/parts/150141M173100/Wurth%20Electronics%20Inc./view-part/281733/?ref=snap
DD1: "SIMPLE SWITCHER® Power Converter 150 KHz 3A Step-Down Voltage Regulator, 5-pin TO-263", Manufacturer="National Semiconductor", ComponentLink1URL=http://www.national.com/ds/LM/LM2596.pdf, ComponentLink2URL=http://www.national.com/pf/LM/LM2596.html, ComponentLink3URL=http://www.national.com/packaging/folders/ts5b.html, CompType=Switcher, PartNumber=LM2596S-ADJ, Published=13.04.2012, Publisher="Reukov A.V."
DD2: "High-Voltage, High-Current Darlington Array", Published=16.07.2012, Publisher="Reukov A.V."
DD3: "Low-Power, Slew-Rate-Limited RS-485/RS-422 Transceiver", ComponentLink1URL=http://pdfserv.maxim-ic.com/en/ds/MAX1487-MAX491.pdf, Type=MAX485
G1: library part "G - L7812", "Линейный стабилизатор 12В 0,5А", Indication={Indication}, Name=L7812
IC1: library part W25Q128FVEIG, "128M-bit Serial Flash Memory with uniform 4KB sectors and Dual/Quad SPI and QPI"
IC2: "Stepper Motor Controller"
ISO1: library part ISO7341
J1 J3 J7: "Socket; IDC; male; PIN: 6; straight; THT; gold plated; 2.54mm"
J2: "2~24 Poles, Screw Type, Horizontal, 5.0 Pitch, 26~14 _AWG_, Terminal Block Connector", Package=None, Availability=Unavailable, MF="CUI Devices", MP=TB003-500-P02BE, Price=None, SnapEDA_Link=https://www.snapeda.com/parts/TB003-500-P02BE/CUI%20Devices/view-part/3590637/?ref=snap
J4 J5: "Jack Modular Connector 8p8c _RJ45, Ethernet_ 90Â° Angle _Right_ Shielded", Package=None, Availability=Unavailable, MF="Assmann WSW", MP=A-2004-2-4-LPS-N-R, Price=None, SnapEDA_Link=https://www.snapeda.com/parts/A-2004-2-4-LPS-N-R/Assmann%20WSW%20Components/view-part/454861/?ref=snap
J6: "2~24 Poles, Screw Type, Horizontal, 5.0 Pitch, 26~14 (AWG), Terminal Block Connector", Package=None, Availability=Bad, Check_prices=https://www.snapeda.com/parts/TB003-500-P12BE/CUI%20Devices/view-part/3590687/?ref=eda, CUI_purchase_URL=https://www.cuidevices.com/product/interconnect/connectors/terminal-blocks/tb003-500-series?utm_source=snapeda.com&utm_medium=referral&utm_campaign=snapedaBOM, MF="CUI Devices", MP=TB003-500-P12BE, Price=None, SnapEDA_Link=https://www.snapeda.com/parts/TB003-500-P12BE/CUI%20Devices/view-part/3590687/?ref=snap
J8: "Socket; IDC; male; PIN: 10; straight; THT; gold plated; 2.54mm", Package=None, Availability=Unavailable, BuyPart=https://www.snapeda.com/parts/DS1013-10SSIB1/Connfly/view-part/951223/?ref=eda, MF=Connfly, MP=DS1013-10SSIB1, Price=None, SnapEDA_Link=https://www.snapeda.com/parts/DS1013-10SSIB1/Connfly/view-part/951223/?ref=snap
L1: "6.5ÂµH Shielded Wirewound Inductor 6A 18mOhm Max Nonstandard", Package="Nonstandard Bourns", Availability=Unavailable, MF=Bourns, MP=SRR1208-6R5ML, Price=None, SnapEDA_Link=https://www.snapeda.com/parts/SRR1208-6R5ML/Bourns/view-part/353452/?ref=snap
OK1 OK2 OK3: "#10-32 Round Head Machine Screw Slotted Drive Nylon", Package="DIP-4 Sharp", Availability=Unavailable, MF="Essentra Components", MP=PC814, Price=None, SnapEDA_Link=https://www.snapeda.com/parts/PC814/Essentra%20Components/view-part/624045/?ref=snap
Q1: library part "Quartz Crystal", "Quartz Crystal"
R1 R2 R3 R4 R5 R6 R7 R8 R9 R10 R11 R12 R13 R14 R15 R16 R17 R18 R19 R20 R21 R22 R23 R24 R25 R26 R27 R28 R29 R30 R31 R32 R33 R34 R35 R36 R37 R38 R39 R40 R41 R42 R43 R44 R45 R46 R47 R48 R49 R50 R51 R52 R53 R54 R55 R56 R57 R58 R59 R60 R61 R62 R63 R64 R65: library part Resistor
R66 R67: library part Res, "Resistor", Power_W=0.065, Tolerance_Percent=5, Body=0603, Class="Электронные компоненты", Installation=SMD, Ordering_Information="0603, 1k, 5%", Pins=2, SubClass=Резисторы
R68: library part Res, "Resistor", Power_W=0,065, Tolerance_Percent=5, Body=0603, Class="Электронные компоненты", Installation=SMD, Ordering_Information="0603, 10k, 5%", Pins=2, SubClass=Резисторы
R69: library part Res, "Resistor", Power_W=0,125, Tolerance_Percent=5, Class="Электронные компоненты", Installation=SMD, Ordering_Information="0805, 5,1k, 5%", Pins=2, SubClass=Резисторы
S1 S2: "3 Pole, Raised Actuator, Flat Bottom, Long Pin, DIP Switch", Package=None, Availability=Unavailable, MF="CUI Devices", MP=DS04-254-1L-03BK, Price=None, SnapEDA_Link=https://www.snapeda.com/parts/DS04-254-1L-03BK/CUI%20Devices/view-part/4467361/?ref=snap
SW1 SW2: library part "SMD Solder Jumper", "2 SMD Pads for Bound by Solder  Drop"
TP1 TP2 TP3 TP4 TP5 TP6 TP7 TP8 TP9: library part "Test Point", "Test Point"
U1: "Linear Voltage Regulator IC 1 Output 800mA TO-220-3", Package="TO-220 Texas Instruments", Availability=Unavailable, MF="Texas Instruments", MP=LM1117T-3.3, Price=None, SnapEDA_Link=https://www.snapeda.com/parts/LM1117T-3.3/Texas%20Instruments/view-part/103788/?ref=snap
U2: "High-Speed CAN Transceiver, 8-Pin SOIC, Industrial Temperature", Supplier Part Number 1=MCP2551-I/SN-ND, Code_IPC=SOIC127P600-8, Code_JEDEC=MS-012, ComponentLink1Description=Datasheet, ComponentLink1URL=http://ww1.microchip.com/downloads/en/DeviceDoc/21667E.pdf, ComponentLink2Description="Packaging Specification", ComponentLink2URL=http://www.microchip.com/stellent/groups/techpub_sg/documents/packagingspec/en012702.pdf, ComponentLink3Description="Microchip.com Home", ComponentLink3URL=http://www.microchip.com/, DatasheetVersion="revE, Jan-2007", PackageDescription="8-Lead Plastic Small Outline (SN) - Narrow, 3.90mm Body [SOIC]", PackageReference=SOIC-SN8, PackageVersion="revBB, Aug-2009", Published=29-Jan-2009, Publisher="Altium Limited", Supplier 1=Digi-Key, Supplier 2=Farnell, Supplier Part Number 2=9758569
U3: "Low-Voltage High-Speed Quadruple Differential Line Receiver 16-SOIC -40 to 85", Package="SOIC-16 Texas Instruments", Availability=Good, Check_prices=https://www.snapeda.com/parts/AM26LV32IDR/Texas%20Instruments/view-part/95750/?ref=eda, MF="Texas Instruments", MP=AM26LV32IDR, Price=None, Purchase-URL=https://pricing.snapeda.com/search/part/AM26LV32IDR/?ref=eda, SnapEDA_Link=https://www.snapeda.com/parts/AM26LV32IDR/Texas%20Instruments/view-part/95750/?ref=snap
U4 U5 U6 U9 U11 U12 U13 U15 U16 U17 U18: "1-?, 5-V, 2:1 (SPDT), analog switch (6-pin SOT-23, SC70 packages) 6-SOT-23 -40 to 85", Package="SOT-23-6 Texas Instruments", Arrow_Electronics-Purchase-URL=https://snapeda.com/shop?store=Arrow+Electronics&id=332002, Availability=Good, Check_prices=https://www.snapeda.com/parts/TS5A3160DBVR/Texas%20Instruments/view-part/332002/?ref=eda, DigiKey-Purchase-URL=https://snapeda.com/shop?store=DigiKey&id=332002, MF="Texas Instruments", Mouser-Purchase-URL=https://snapeda.com/shop?store=Mouser&id=332002, MP=TS5A3160DBVR, Price=None, SnapEDA_Link=https://www.snapeda.com/parts/TS5A3160DBVR/Texas%20Instruments/view-part/332002/?ref=snap, Texas_Instruments-Purchase-URL=https://snapeda.com/shop?store=Texas+Instruments&id=332002
U7: "Inverter IC 6 Channel Schmitt Trigger 14-TSSOP", Package="TSSOP-14 ON Semiconductor", Availability=Unavailable, Check_prices=https://www.snapeda.com/parts/74VHC14MTC/ON%20Semiconductor/view-part/2773904/?ref=eda, MF="ON Semiconductor", MP=74VHC14MTC, Price=None, SnapEDA_Link=https://www.snapeda.com/parts/74VHC14MTC/ON%20Semiconductor/view-part/2773904/?ref=snap
U8: "ARMÂ® CortexÂ®-M4 STM32F3 Microcontroller IC 32-Bit 72MHz 100-LQFP (14x14)", Package="LQFP-100 STMicroelectronics", Availability=Unavailable, MF=STMicroelectronics, MP=STM32F303V, Price=None
U10 U14: "8-Bit Bidirectional Voltage-Level Shifter For Open-Drain And Push-Pull Application", Package="TSSOP-20 Texas Instruments", Availability=Unavailable, DigiKey-Purchase-URL=https://snapeda.com/shop?store=DigiKey&id=105750, MF="Texas Instruments", Mouser-Purchase-URL=https://snapeda.com/shop?store=Mouser&id=105750, MP=TXS0108EPWR, Price=None, SnapEDA_Link=https://www.snapeda.com/parts/TXS0108EPWR/Texas%20Instruments/view-part/105750/?ref=snap, Texas_Instruments-Purchase-URL=https://snapeda.com/shop?store=Texas+Instruments&id=105750
VT1: library part BC807, "PNP Bipolar Transistor", Published=8-Jun-2000, Publisher="Reukov A.V."
VT2: library part "VT - BC846", "NPN транзистор", Indication={Indication}, Name=BC846
X1: library part "X - Micro USB B (Bottom mount ass'y)", "Микро USB B разъем с нижним креплением", Indication={Indication}, Name={Name}
X2: "Header, 5-Pin", LatestRevisionDate=17-Jul-2002, LatestRevisionNote="Re-released for DXP Platform.", Publisher="Altium Limited"
X3: library part "X - PLS-4", "Рядный разъем PLS-4.", Indication={Indication}, Name={Name}
XP1 XP2 XP3: library part "Select jump", "Connector, 3-Pin", Class="Электронные компоненты", Installation=DIP, Ordering_Information={Ordering_Information}, Pins=3, Pitch_mm={Pitch_mm}, SubClass=Разъемы, Type_of_connector={Type_of_connector}

## Via types
v1: diameter 0.8, hole 0.3, Top Layer to Bottom Layer, tented both sides, 145 vias
v2: diameter 1.5, hole 0.7, Top Layer to Bottom Layer, tented both sides, 35 vias
v3: diameter 4, hole 3.5, Top Layer to Bottom Layer, tented both sides, 4 vias

## Nets (pads, with @x,y where several pads share a name; then routed paths per layer and width w, separated by ;. In a path a pad name is that pad's centre, name@x,y a point inside that pad or via, vN(x,y) a via of type N, cw(c..) or ccw(c..) an arc to the next point about the centre after c; other vN are vias at no path point)
485_A: D3.1 J4.2 J5.2 R9.2 R11.1 S1.3A | length 89.3
  Top Layer w0.5: S1.3A@45.925,110.425 46.08,110.27 46.08,108.293 46.372,108 52.95,108 55.525,105.425 89.325,105.425 90.8,103.95 90.8,100.35 89.435,98.985 J5.2@87.625,98.985
  Bottom Layer w0.5: R11.1@42.075,107.7 42.113,107.662 45.888,107.662 R9.2@45.925,107.625 S1.3A@45.925,110.425 ; D3.1@72.425,99.5 72.4,99.475 70.301,99.475 69.811,98.985 J4.2@67.675,98.985 69.65,97.01 85.65,97.01 J5.2@87.625,98.985
485_B: D3.2 J4.1 J5.1 R10.1 S1.1A S1.2A | length 85.6
  Top Layer w0.5: S1.2A@48.465,110.425 S1.1A@51.005,110.425
  Bottom Layer w0.5: R10.1@42.625,110.225 42.625,110.425 43.975,111.775 47.115,111.775 S1.2A@48.465,110.425 48.45,110.41 48.45,109.125 49.45,108.125 53.025,108.125 56.65,104.5 90.05,104.5 90.525,104.025 90.525,101.818 90.232,101.525 J5.1@88.895,101.525 88.7,101.72 88.7,103.507 88.407,103.8 71.22,103.8 J4.1@68.945,101.525 69.07,101.4 D3.2@72.425,101.4
+3.3v: C4.1 C7.1 C8.1 C12.2 C16.1 C17.1 C18.1 D11.1 IC1.8 ISO1.1 ISO1.7 R19.2 R63.1 R64.1 SW1.1 U1.2 U3.16 U4.5 U5.5 U6.5 U8.6 U8.28 U8.50 U8.75 U8.100 U10.2 U14.2 VT1.2 | length 366.9
  Top Layer w0.254: VT1.2@4.45,101.95 6.35,101.95 R19.2@6.5,102.1 ; C18.1@18.575,47.275 19.6,47.275 21.525,49.2 U8.28@21.525,50.495 ; C7.1@18.775,67.4 18.875,67.4 19.802,66.473 20.512,66.473 20.525,66.46 U8.100@20.525,65.855 ; U8.50@32.525,50.495 32.525,49.89 32.538,49.877 33.098,49.877 34.5,48.475 C17.1@34.5,48.375 ; U8.75@34.205,64.175 34.205,66.18 35.15,67.125 36.175,67.125 C8.1@36.425,66.875
  Top Layer w0.3: U14.2@28.075,41.52 28.13,41.465 28.13,40.66 30.34,38.45 v2(32.75,38.45) ; U10.2@40.825,38.395 40.8,38.37 40.8,37.25 41.3,36.75 v2(43.575,36.75)
  Top Layer w0.5: D11.1@3.775,71.975 3.775,71.675 3.975,71.475 4.275,71.475 4.852,70.898 4.852,70.073 v2(5,69.925) ; VT1.2@4.45,101.95 4.45,103.7 v2(6.325,105.575) ; v2(15.675,79.125) 15.727,79.073 15.727,68.4 16.727,67.4 C7.1@18.775,67.4 ; R63.1@34.2,87.225 40.075,87.225 v2(41.5,85.8) 41.5,87.775 42.7,88.975 49.825,88.975 51.35,87.45 ISO1.7@51.35,85.46 ; v2(38.375,41.925) 38.375,43.45 38.675,43.75 C16.1@39.825,43.75 39.825,45.595 IC1.8@39.85,45.62 ; v2@42.111,85.46 ISO1.1@43.73,85.46 ; R64.1@50.525,17.7 50.625,17.8 52.475,17.8 60.275,10 64.032,10 64.325,10.293 64.325,12.625 ; U4.5@63.045,12.65 64.3,12.65 64.325,12.625 ; U5.5@63.045,16.4 64.3,16.4 64.325,16.425 ; U6.5@63.045,20.125 64.275,20.125 64.325,20.075 ; SW1.1@63.85,52.525 63.95,52.625 U1.2@63.95,58.175 61.4,55.625 61.4,26.65 64.325,23.725 ; v1(65.125,22.825) 65.125,22.925 64.325,23.725 ; v1(75.9,20.325) 75.902,20.323 77.997,20.323 U3.16@78,20.32 ; 64.325,12.625 64.325,16.425 ; 64.325,16.425 64.325,20.075 ; 64.325,20.075 64.325,23.725
  Bottom Layer w0.254: v1(20.775,61.65) 22.2,61.65 22.225,61.625 C12.2@22.275,61.675
  Bottom Layer w0.5: v2(5,69.925) 6.475,69.925 11.75,75.2 ; v2(6.325,105.575) 4.85,104.1 4.85,91.6 7.525,88.925 7.525,79.425 11.75,75.2 ; v2(32.75,38.45) 34.45,36.75 v2(43.575,36.75) v2@43.6,36.775 ; v2(38.375,41.925) 40.8,41.925 43.6,39.125 v2@43.6,36.775 ; v2@41.663,85.637 43.45,85.637 43.6,85.487 C4.1@43.6,85.475 ; U1.2@63.95,58.175 63.95,56.275 ; v1(65.125,22.825) 73.4,22.825 v1(75.9,20.325) ; 11.75,75.2 v2(15.675,79.125) 15.675,85.275 22.7,92.3 32.4,92.3 38.9,85.8 v2(41.5,85.8) 41.5,85.648 44.748,82.4 53.752,82.4 57.686,78.466 57.686,59.916 61.619,55.982 63.657,55.982 63.95,56.275 ; v2@43.6,36.775 48.9,42.075 48.9,44 50.725,45.825 64.75,45.825 66.35,47.425 66.35,53.875 63.95,56.275
+5v: C3.1 C25.2 D1.1 IC2.12 J6.1 J8.9 L1.P$2 R1.2 R28.2 R29.2 R30.2 R31.2 R32.2 R33.2 R34.2 R35.2 R36.2 R61.2 R65.1 U7.14 U10.19 U14.19 | length 334.7
  Top Layer w0.3: U14.19@28.075,35.78 28.13,35.725 28.13,34.671 28.251,34.55 32.075,34.55 ; 39.735,34.55 40.77,33.515 40.77,32.71 U10.19@40.825,32.655 ; 44.675,34.55 50.575,28.65 R65.1@50.575,20.4 ; U7.14@80.331,28.63 80.331,28.675 80.359,28.703 80.697,28.703 v2(82.3,27.1)
  Top Layer w0.5: v1(25.75,33.3) 30.825,33.3 32.075,34.55 39.735,34.55 44.675,34.55
  Top Layer w0.6: 44.675,34.55 v2(47.4,34.55) ; 69.05,69.125 69.05,87.535 D1.1@72.74,91.225
  Top Layer w1.5: C3.1@61.41,66.06 C3.1@61.575,66.225 61.575,67.875 62.825,69.125 69.05,69.125 L1.P$2@76.25,69.125
  Bottom Layer w0.3: R61.2@4.475,16.5 4.624,16.649 5.449,16.649 6.075,17.275 7.3,17.275 8.075,18.05 8.075,26.5 7.15,27.425 5.801,27.425 5.625,27.601 5.625,32.665 IC2.12@6.7,33.74
  Bottom Layer w0.5: IC2.12@6.7,33.74 12.065,33.74 13.375,35.05 24,35.05 v1(25.75,33.3)
  Bottom Layer w0.6: J8.9@35.025,6.475 55.25,26.7 ; v2(47.4,34.55) 55.25,26.7 ; C3.1@61.575,66.225 63.225,67.875 63.225,68.2 C25.2@63.325,68.3 ; 70.675,64.45 85.125,50 R1.2@85.125,49.8 ; R36.2@96.825,64.05 R35.2@96.825,59.525 R34.2@96.825,54.35 R33.2@96.825,49.275 R32.2@96.825,44.175 R31.2@96.825,39.3 ; J6.1@101.25,9.475 96.825,13.9 R28.2@96.825,24.35 R29.2@96.825,29.475 R30.2@96.825,34.575 R31.2@96.825,39.3 ; 55.25,26.7 55.325,26.775 81.499,26.775 81.651,26.928 82.128,26.928 v2(82.3,27.1) 94.5,39.3 R31.2@96.825,39.3
  Bottom Layer w1: C3.1@61.575,66.225 63.2,64.6 96.275,64.6 96.625,64.25 96.825,64.25 R36.2@96.825,64.05
+5v_ISO: C1.2 C5.2 C6.2 DD3.8 ISO1.10 ISO1.16 R4.2 R23.1 U2.3 XP1.2 | length 70.7
  Top Layer w0.5: DD3.8@31.47,107.55 31.47,108.2 31.42,108.25 R23.1@27.225,108.25 27.025,108.25 25.875,107.1 25.875,101.401 28.176,99.1 33.625,99.1 35.375,97.35 41.2,97.35 41.6,96.95 41.6,95.375 v2(41.725,95.25) 43.68,95.25 43.73,95.2 ISO1.16@43.73,94.74 43.68,94.69 43.68,93.443 43.387,93.15 ; XP1.2@36.925,95.35 36.975,95.35 39.175,93.15 43.387,93.15 ; U2.3@40.035,102.55 40.035,100.621 40.175,100.481 v1(40.175,100.4) ; v2(49.607,98.664) 50.745,98.664 51.35,98.059 ISO1.10@51.35,94.74 51.3,94.69 51.3,93.393 51.057,93.15 43.387,93.15
  Bottom Layer w0.5: v1(40.175,100.4) 41.725,98.85 v2(41.725,95.25) 41.912,95.062 43.55,95.062 43.7,94.912 C5.2@43.7,94.875 ; R4.2@47.925,100.3 47.925,100.1 49.361,98.664 v2(49.607,98.664)
+5v_RJ: J4.4 J5.4 XP1.1 | length 57.1
  Top Layer w0.5: v2(84.825,95.45) 84.955,95.58 84.955,98.855 J5.4@85.085,98.985
  Bottom Layer w0.5: XP1.1@39.465,95.35 40.015,94.8 40.015,93.585 40.85,92.75 58.9,92.75 61.437,95.287 ; J4.4@65.135,98.985 61.437,95.287 ; v2(84.825,95.45) 84.662,95.287 61.437,95.287
A: J8.1 U9.4 | length 17.7
  Top Layer w0.3: J8.1@45.185,6.475 47,8.29 U9.4@47,23.44
A3.3v: C15.2 J7.6 R57.2 SW1.2 U8.22 | length 137.6
  Top Layer w0.254: R57.2@12.15,53.7 C15.2@10.35,53.7 10.4,53.75 12.15,53.75 R57.2@12.475,53.75 12.475,53.55 12.848,53.177 13.048,53.177 13.675,52.55 15.2,52.55 16.325,53.675 U8.22@18.845,53.675
  Top Layer w0.5: v2(4.652,44.325) 6.052,45.725 10.532,45.725 10.825,46.018 10.825,51.875 12.15,53.2 R57.2@12.15,53.7 ; v2(63.825,47.45) 63.825,49.3 SW1.2@63.85,49.325
  Bottom Layer w0.5: v2(4.652,44.325) 4.2,44.325 1.175,41.3 1.175,15.7 12.94,3.935 J7.6@18.07,3.935 ; v2(10.825,50.125) 12.025,48.925 30.2,48.925 35.35,43.775 46.9,43.775 50.575,47.45 v2(63.825,47.45)
AGND: C15.1 J7.2 R53.2 R54.2 R55.2 R56.2 SW2.2 U8.20 | length 113.5
  Top Layer w0.3: 15.316,54.675 U8.20@18.845,54.675
  Top Layer w0.4: v2(9.375,47.625) 9.375,47.923 8.75,48.548 C15.1@8.75,53.7 8.741,53.709 8.741,54.616 8.975,54.85 15.141,54.85 15.316,54.675
  Top Layer w1: v2@1.75,37.625 R56.2@1.75,48.075 R53.2@1.75,50.1 R54.2@1.75,52.1 R55.2@1.75,54.125 ; v2(2.375,37.375) 2.375,9.898 4.025,8.248 v2(4.025,8.175) ; SW2.2@22.875,13.625 22.875,13.275 25.9,10.25 25.9,4.521 25.314,3.935 J7.2@23.15,3.935
  Bottom Layer w1: v2(2.375,37.375) 5.297,40.297 6.453,40.297 9.375,43.219 v2(9.375,47.625) ; v2(4.025,8.175) 10.1,2.1 21.315,2.1 J7.2@23.15,3.935
B: J8.3 U12.4 | length 18.3
  Top Layer w0.3: U12.4@39.475,23.44 39.475,12.425 42.525,9.375 42.525,6.595 J8.3@42.645,6.475
C: J8.5 U15.4 | length 20.4
  Top Layer w0.3: U15.4@31.775,23.44 31.775,17.55 40.105,9.22 J8.5@40.105,6.475
CLK: J3.5 U8.78 | length 51
  Top Layer w0.254: J3.5@22.14,106.655 20.8,105.315 20.8,100.275 27.775,93.3 27.775,76.683 27.25,76.158 v1(27.25,74.8) ; U8.78@31.525,65.855 31.525,67.392 32.728,68.596 33.146,68.596 v1(33.25,68.7)
  Bottom Layer w0.254: v1(27.25,74.8) 27.25,69.567 28.222,68.596 33.146,68.596 v1(33.25,68.7)
CS: J3.2 U8.77 | length 51.8
  Top Layer w0.254: J3.2@19.6,101.575 19.6,100.833 27.025,93.408 27.025,76.575 26.05,75.6 v1(26.05,74) ; U8.77@32.025,65.855 32.025,67.25 32.65,67.875 33.65,67.875 34.425,68.65 v1(34.425,69.85)
  Bottom Layer w0.254: v1(26.05,74) 26.154,73.896 26.154,70.021 28.7,67.475 33.525,67.475 34.425,68.375 v1(34.425,69.85)
D: J8.7 U17.4 | length 22.5
  Top Layer w0.3: U17.4@24.3,23.44 24.3,21.375 37.565,8.11 J8.7@37.565,6.475
DAC1: IC2.15 U8.29 | length 34.7
  Top Layer w0.254: IC2.15@6.7,26.12 6.72,26.1 8.526,26.1 8.675,26.249 8.675,37.85 11.525,40.7 16.475,40.7 17.9,42.125 17.9,43.425 v1(20.175,45.7) 20.175,47.025 22.012,48.862 22.012,50.482 U8.29@22.025,50.495
DAC2: TP4.1 U8.30 | length 10.6
  Top Layer w0.254: v1(22.225,48) 22.225,48.148 22.525,48.448 U8.30@22.525,50.495
  Bottom Layer w0.254: TP4.1@16.1,43.625 16.407,43.932 17.082,43.932 21.15,48 v1(22.225,48)
EN_B: J8.4 U13.4 XP3.2 | length 40.6
  Top Layer w0.3: U13.4@35.525,23.44 35.525,15.05 41.375,9.2 41.375,5.4 42.645,4.13 J8.4@42.645,3.935
  Bottom Layer w0.3: J8.4@42.645,3.935 44.13,2.45 45.95,2.45 50.7,7.2 56.325,7.2 57.585,5.94 XP3.2@57.65,5.94
EN_D: J8.8 U18.4 XP2.2 | length 46.1
  Top Layer w0.3: U18.4@20.55,23.44 20.55,20.95 21.35,20.15 23.4,20.15 36.3,7.25 36.3,5.2 J8.8@37.565,3.935
  Bottom Layer w0.3: J8.8@37.565,3.935 39.825,1.675 46.675,1.675 50.94,5.94 XP2.2@53.25,5.94
EN_hard: U8.33 U14.10 | length 9.5
  Top Layer w0.254: U14.10@22.875,41.52 22.875,43.25 24.025,44.4 U8.33@24.025,50.495
EN_soft: U8.46 U10.10 | length 14.9
  Top Layer w0.254: U8.46@30.525,50.495 30.525,47.073 30.975,46.623 v1(30.975,46.475) ; v1(34,39.85) 35.225,39.85 35.625,39.45 U10.10@35.625,38.395
  Bottom Layer w0.254: v1(30.975,46.475) 34,43.45 v1(34,39.85)
GND: C2.2 C3.2 C4.2 C7.2 C8.2 C9.2 C10.1 C11.2 C12.1 C13.2 C14.1 C16.2 C17.2 C18.2 C19.2 C20.2 C21.2 C22.2 C23.2 C24.2 C25.1 C26.1 C27.1 D1.2 D2.A D4.1 D5.2 D6.2 D7.2 D8.2 D9.2 D10.2 D12.2 D13.2 D14.2 DD1.3 DD1.6 DD2.8 G1.2 IC1.4 IC2.2 ISO1.2 ISO1.8 J2.1 J3.4 J6.2 J6.3 J8.10 OK1.2 OK2.2 OK3.2 R5.2 R8.2 R14.2 R18.2 R43.2 R58.1 R62.1 R68.2 R69.2 S2.1B S2.2B S2.3B SW2.1 U1.1 U3.8 U4.2 U5.2 U6.2 U7.7 U8.49 U8.74 U8.99 U9.2 U10.11 U11.2 U12.2 U13.2 U14.11 U15.2 U16.2 U17.2 U18.2 VT2.2 X1.4 X1.5 X2.3 X3.4 | length 128.6
  Top Layer w0.254: R43.2@16.7,71.3 16.7,71.1 18.402,69.398 18.402,69.273 18.675,69 C7.2@18.775,69 20.025,69 21.025,68 U8.99@21.025,65.855 ; v1(32.075,52.525) 32.038,52.488 32.038,50.508 U8.49@32.025,50.495 32.025,49.334 32.611,48.748 32.627,48.748 32.9,48.475 C17.2@32.9,48.375 ; v1(33.5,32.675) 35.605,32.675 U10.11@35.625,32.655 ; U8.74@34.205,63.675 34.218,63.688 35.08,63.688 36.052,64.66 36.052,65.002 36.325,65.275 C8.2@36.425,65.275 36.375,65.325 v1(35.075,65.325) ; v1(66.95,18.225) v1@66.975,18.225
  Top Layer w0.3: v2(74.35,34.825) 76.391,34.825 76.419,34.797 U7.7@76.419,34.32 ; C11.2@74.55,30.675 76.265,30.675 76.565,30.975 v1(76.7,30.975) ; v1(85.275,33.125) 85.377,33.125 85.927,32.575 C9.2@87.05,32.575
  Top Layer w0.5: v1(44.95,83.55) 44.975,83.575 44.975,85.435 ISO1.2@45,85.46 ; R8.2@62.825,73.35 62.96,73.215 65.63,73.215 OK1.2@65.765,73.08 ; R14.2@62.825,79.062 62.954,78.934 65.636,78.934 OK2.2@65.765,78.805 ; R18.2@62.825,84.775 63.038,84.562 65.608,84.562 OK3.2@65.765,84.405 ; v2(79.475,75.775) 79.475,76.046 79.825,76.396 79.825,77.705 79.875,77.755 DD2.8@80.675,77.755
  Top Layer w0.6: v2@88,62.925 86.179,62.925 84.882,61.628 D2.A@84.882,61.375 85.232,61.025 D2.A@85.4,61.025 ; v2(88.025,59.45) 87.781,59.45 87.461,59.77 85.979,59.77 85.4,60.349 D2.A@85.4,61.025 ; v2(88.025,61.188) 87.987,61.225 85.6,61.225 D2.A@85.4,61.025
  Top Layer w1: C2.2@92.575,70.85 92.6,70.875 100.75,70.875 J2.1@101.25,70.375
  Bottom Layer w0.5: v1(44.95,83.55) 44.95,83.631 45.2,83.881 C4.2@45.2,85.475 ; OK1.2@65.765,73.08 65.895,72.95 67.575,72.95 68.48,73.855 68.48,77.3 ; OK2.2@65.765,78.805 65.785,78.825 68.48,78.825 ; OK3.2@65.765,84.405 68.48,84.405 ; D1.2@70.2,91.225 70.2,86.125 68.48,84.405 ; D12.2@70.91,29.625 D14.2@70.91,33.925 ; v2(79.475,75.775) 77.95,77.3 68.48,77.3 ; D5.2@91.41,7.725 D6.2@91.41,10.615 D7.2@91.41,13.505 D8.2@91.41,16.395 D9.2@91.41,19.285 D10.2@91.41,22.175 ; 68.48,77.3 68.48,78.825 ; 68.48,78.825 68.48,84.405
  Bottom Layer w0.6: v2@87.988,61.225 88.025,61.225 v2@88.212,61.038 ; v2@88,62.925 v2@88.212,62.713
  Bottom Layer w1: C24.2@2.425,20.875 C22.2@2.425,24.455 C20.2@2.425,28.035 C19.2@2.425,29.825
  other v1: 67.75,15.675 37.725,28.125 32.75,28.625 43.75,28.9 40.475,28.95 30.675,29 47.95,29 22.925,29.225 25.6,29.25
  other v2: 88.025,62.925
  other v3: 3.25,2.95 102.575,2.95 3.25,108.975 102.575,108.975
GND_ISO: C1.1 C5.1 C6.1 D1.5 D3.3 DD3.5 ISO1.9 ISO1.15 J4.3 J4.S1 J4.S2 J5.3 J5.S1 J5.S2 R3.2 R6.1 R22.2 U2.2 | length 37.2
  Top Layer w0.5: R22.2@29.025,104.275 29.175,104.275 29.425,104.525 C6.1@29.425,106.525 29.525,106.525 30.4,105.65 34.875,105.65 ; DD3.5@35.28,107.55 35.23,107.5 35.23,106.005 34.875,105.65 ; U2.2@38.765,102.55 38.765,103.227 39.418,103.88 39.418,104.601 39.336,104.682 39.303,104.682 38.335,105.65 34.875,105.65 ; ISO1.15@45,94.74 v2(45,96.95) ; ISO1.9@52.62,94.74 52.62,95.47 53.55,96.4 ; C1.1@53.541,98.55 53.55,98.541 53.55,96.4 ; D1.5@62.58,91.225 57.605,96.2 53.75,96.2 53.55,96.4
  Bottom Layer w0.5: R6.1@37.85,103.9 38.1,104.15 38.919,104.15 39.394,104.625 v1(39.475,104.625)
INH1(EN_A): J8.2 U11.4 XP3.3 | length 33.6
  Top Layer w0.3: U11.4@43.25,23.44 43.25,9.35 43.875,8.725 43.875,5.245 J8.2@45.185,3.935 45.95,4.7 56.35,4.7 XP3.3@57.65,3.4
INH2(EN_C): J8.6 U16.4 XP2.3 | length 38.5
  Top Layer w0.3: U16.4@28.025,23.44 28.025,19.1 38.85,8.275 38.85,5.19 J8.6@40.105,3.935 41.34,2.7 46.949,2.7 47.649,3.4 XP2.3@53.25,3.4
l297_A: IC2.4 U9.1 | length 41.4
  Top Layer w0.3: U9.1@48.9,25.95 48.913,25.962 48.913,28.113 v1(48.925,28.125)
  Bottom Layer w0.3: IC2.4@15.2,21.04 20.54,21.04 22.525,23.025 48.175,23.025 48.875,23.725 48.875,28.075 v1(48.925,28.125)
l297_B: IC2.6 U12.1 | length 32.7
  Top Layer w0.3: U12.1@41.375,25.95 v1(41.375,28)
  Bottom Layer w0.3: IC2.6@15.2,26.12 16.38,26.12 18.475,24.025 40.724,24.025 41.375,24.676 v1(41.375,28)
l297_C: IC2.7 U15.1 | length 25.3
  Top Layer w0.3: U15.1@33.675,25.95 33.688,25.963 33.688,27.938 v1(33.7,27.95)
  Bottom Layer w0.3: IC2.7@15.2,28.66 15.2,28.5 19.175,24.525 32.949,24.525 33.7,25.276 v1(33.7,27.95)
l297_D: IC2.9 U17.1 | length 20.1
  Top Layer w0.3: U17.1@26.2,25.95 26.213,25.962 26.213,27.938 v1(26.225,27.95)
  Bottom Layer w0.3: IC2.9@15.2,33.74 17.5,31.44 17.5,28.325 20.3,25.525 25.225,25.525 26.225,26.525 v1(26.225,27.95)
l297_INH1: IC2.5 U11.1 | length 35.8
  Top Layer w0.3: U11.1@45.15,25.95 v1@45.15,27.989
  Bottom Layer w0.3: IC2.5@15.2,23.58 15.255,23.525 43.95,23.525 45.2,24.775 45.2,27.94 v1(45.151,27.989)
l297_INH2: IC2.8 U16.1 | length 22.1
  Top Layer w0.3: U16.1@29.925,25.95 v1(29.925,27.925)
  Bottom Layer w0.3: IC2.8@15.2,31.2 16.75,29.65 16.75,28 19.725,25.025 28.15,25.025 29.925,26.8 v1(29.925,27.925)
MISO: J3.1 U8.79 | length 45.4
  Top Layer w0.254: J3.1@22.14,101.575 22.815,100.899 22.815,99.367 28.6,93.583 28.6,76.147 28.225,75.772 v1(28.225,75.725) ; U8.79@31.025,65.855 31.025,67.75 32.451,69.176 32.553,69.176 33.252,69.875 v1(33.275,69.875)
  Bottom Layer w0.254: v1(28.225,75.725) 28.225,69.725 28.9,69.05 32.45,69.05 v1(33.275,69.875)
MOSI: J3.3 U8.80 | length 45.5
  Top Layer w0.254: J3.3@22.14,104.115 22.23,104.025 23.601,104.025 23.75,103.876 23.75,99.075 29.4,93.425 29.4,76.774 29.549,76.625 31.63,76.625 32.33,75.925 v1(32.475,75.925) ; U8.80@30.525,65.855 30.538,65.868 30.538,68.138 32.252,69.852 v1(32.252,69.903)
  Bottom Layer w0.254: v1(32.252,69.903) 32.252,75.554 32.475,75.777 v1(32.475,75.925)
NetC9_1: C9.1 R50.1 U7.3 | length 12.2
  Top Layer w0.254: U7.3@79.035,34.32 79.035,32.365 81.146,30.254 84.324,30.254 84.473,30.403 84.473,31.373 R50.1@84.55,31.45 84.55,31.348 84.923,30.975 C9.1@87.05,30.975
NetC10_2: C10.2 Q1.2 U8.12 | length 21.5
  Top Layer w0.254: C10.2@3.825,67.35 3.825,65.5 5.525,63.8 5.525,61.475 6.325,60.675 12.525,60.675 12.674,60.526 12.674,59.751 13.323,59.102 16.695,59.102 17.122,58.675 U8.12@18.845,58.675
NetC11_1: C11.1 R51.1 U7.13 | length 11
  Top Layer w0.254: R51.1@72.775,32.75 72.775,31.725 ; C11.1@72.95,30.675 72.775,30.85 72.775,31.725 ; U7.13@79.67,28.63 79.67,29.729 79.075,30.325 78.625,30.325 77.227,31.723 74.14,31.723 74.138,31.725 72.775,31.725
NetC13_1: C13.1 R52.1 U7.9 | length 6.3
  Top Layer w0.254: C13.1@74.925,24.45 75,24.525 R52.1@77.025,24.525 77.08,24.58 77.08,24.725 U7.9@77.08,28.63
NetC14_2: C14.2 Q1.1 U8.13 | length 20.4
  Top Layer w0.254: C14.2@3.825,63.625 3.552,63.352 3.552,61.726 3.3,61.474 Q1.1@3.3,59.525 7.5,59.525 8.396,58.629 16.526,58.629 16.98,58.175 U8.13@18.845,58.175